# EAGLE board BatMeas5.1 (EAGLE 6.4)
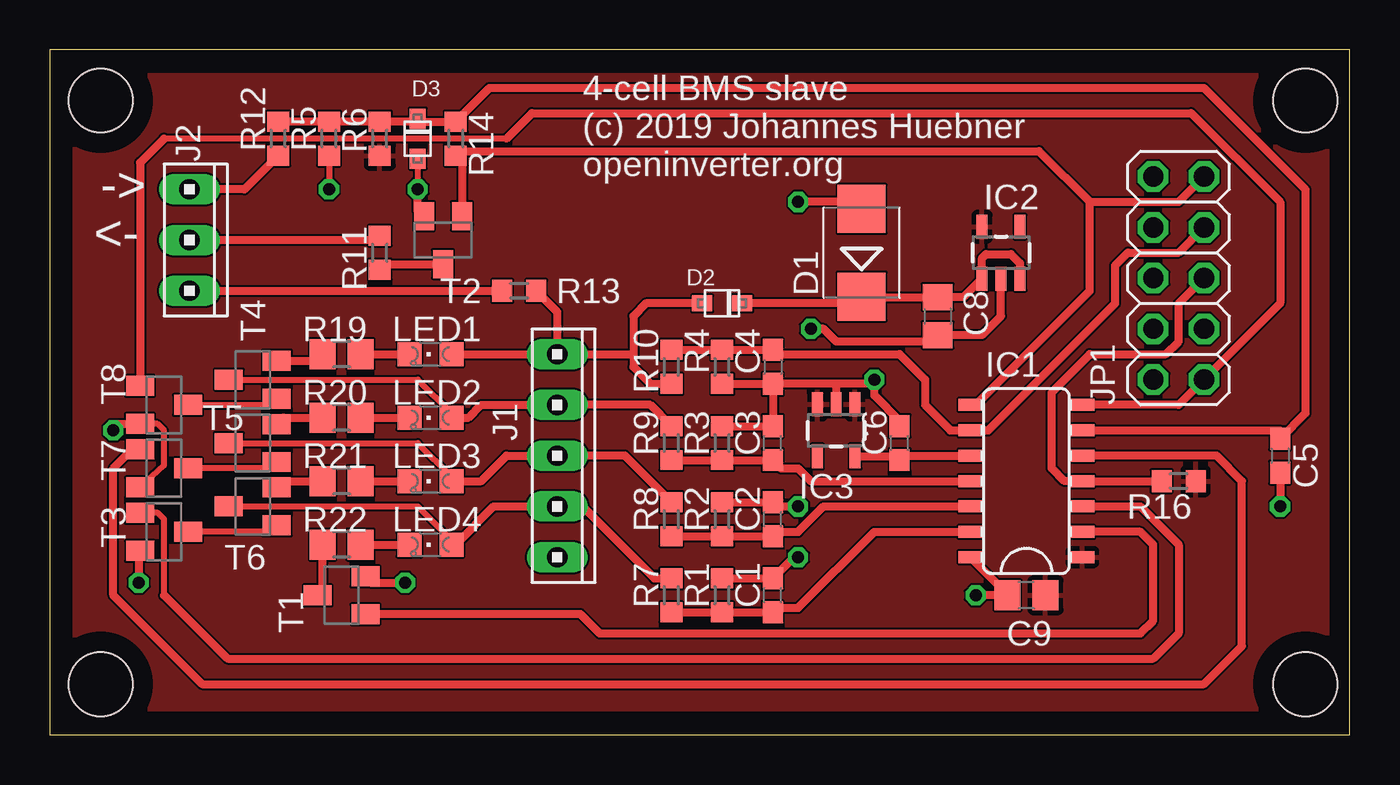
[diagram p0: board, top side]
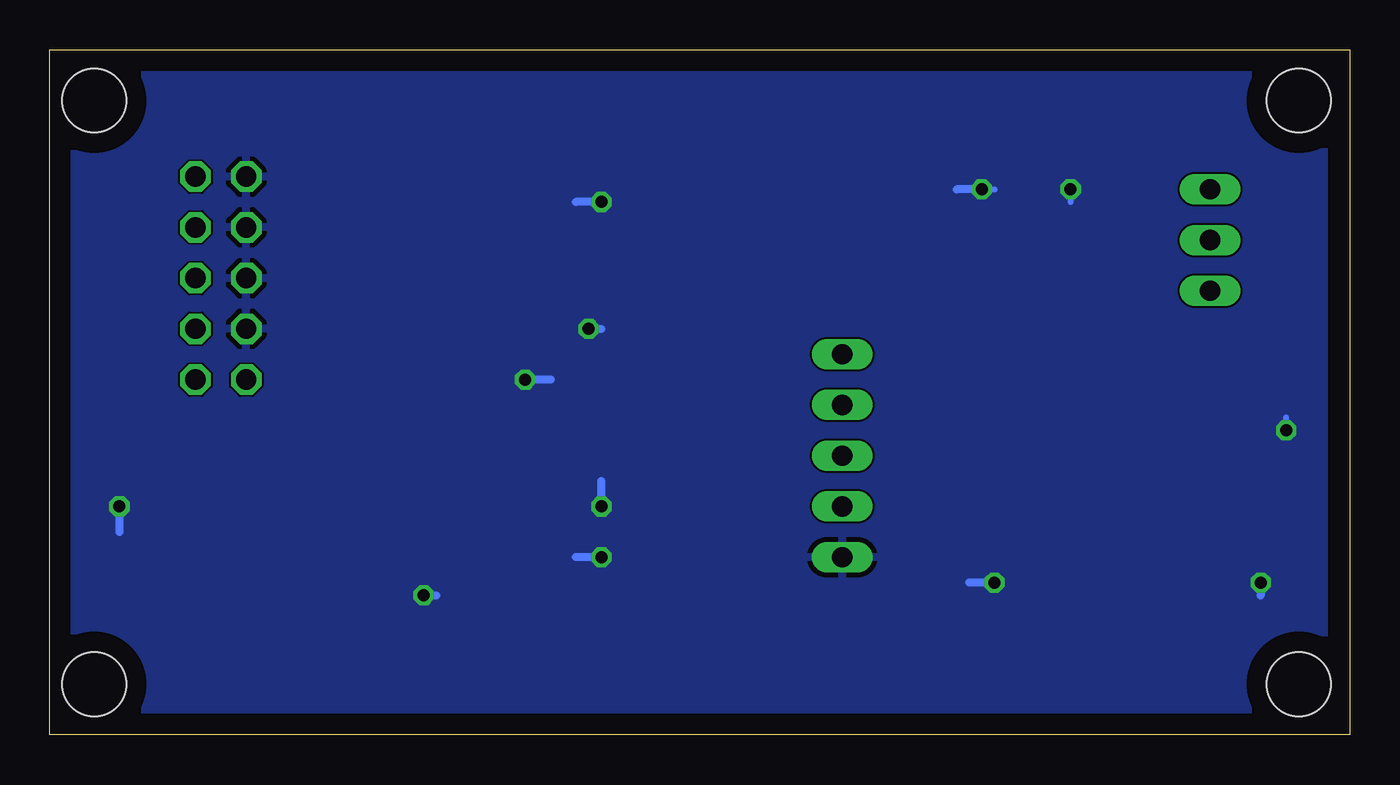
[diagram p1: board, bottom side, seen from below]

Size 65.08 x 34.28 mm. Coordinates in mm from the lower left corner, seen from the top.
Outline: 0,0 65.08,0 65.08,34.28 0,34.28 0,0
Copper layers (1*16): Top 0.035mm / dielectric 1.5mm / Bottom 0.035mm
Design rules "default *": minimum track width 10mil, minimum drill 0.3mm, track to track 4mil, track to pad 4mil, pad to pad 4mil, via to via 4mil, smd to smd 4mil, copper to edge 40mil, drill to drill 8mil, minimum pad ring 10mil, minimum via ring 8mil, stop-mask expansion 4mil, vias tented up to drill 0mil, thermal gap 10mil
Holes 3.2 mm at 2.54,31.75 2.54,2.54 62.87,2.54 62.87,31.75

## Footprints (pad centres in the part's own frame; a part is rotated, then mirrored left to right if it is on the bottom)
C0603 = smd 1.1 x 1: 1 -0.85,0; 2 0.85,0
C0805 = smd 1.3 x 1.5: 1 -0.95,0; 2 0.95,0
SMB = smd 2.4 x 2.4: A 2.2,0; C -2.2,0
SOD-323F = smd 1 x 0.8: A -1,0; C 1,0
SO014 = smd 0.6 x 1.2: 1 -3.175,-2.8; 2 -1.905,-2.8; 3 -0.635,-2.8; 4 0.635,-2.8; 5 1.905,-2.8; 6 3.175,-2.8; 7 4.445,-2.8; 8 4.445,2.8; 9 3.175,2.8; 10 1.905,2.8; 11 0.635,2.8; 12 -0.635,2.8; 13 -1.905,2.8; 14 -3.175,2.8
SOT23-5 = smd 0.55 x 1.2: 1 -0.95,-1.3; 2 0,-1.3; 3 0.95,-1.3; 4 0.95,1.3; 5 -0.95,1.3
10X05MTA = drill 1.016 long: 1 5.08,0; 2 2.54,0; 3 0,0; 4 -2.54,0; 5 -5.08,0
10X03MTA = drill 1.016 long: 1 2.54,0; 2 0,0; 3 -2.54,0
2X05 = drill 1.016 octagon: 1 -5.08,-1.27; 2 -5.08,1.27; 3 -2.54,-1.27; 4 -2.54,1.27; 5 0,-1.27; 6 0,1.27; 7 2.54,-1.27; 8 2.54,1.27; 9 5.08,-1.27; 10 5.08,1.27
CHIPLED_0805 = smd 1.2 x 1.2: A 0,-1.05; C 0,1.05
R0603 = smd 1 x 1.1: 1 -0.85,0; 2 0.85,0
R0805 = smd 1.3 x 1.5: 1 -0.95,0; 2 0.95,0
SC59-BEC = smd 1 x 1.4: B -0.95,-1.2; C 0,1.2; E 0.95,-1.2

## Placement (x,y rotation side)
C1  1µ  [C0603]  36.2,6.99 90 top
C2  100n  [C0603]  36.2,10.79 90 top
C3  100n  [C0603]  36.2,14.61 90 top
C4  100n  [C0603]  36.2,18.41 270 top
C5  4n7  [C0603]  61.59,13.97 270 top
C6  100n  [C0603]  42.55,14.61 90 top
C8  1µ  [C0805]  44.45,20.95 270 top
C9  10µ  [C0805]  48.9,6.99 180 top
D1  20V  [SMB]  40.64,24.13 90 top
D2  [SOD-323F]  33.66,21.59 0 top
D3  [SOD-323F]  18.41,29.84 90 top
IC1  ATTINY24  [SO014]  48.9,12.06 90 top
IC2  3V3  [SOT23-5]  47.62,24.13 0 top
IC3  3V  [SOT23-5]  39.37,15.24 180 top
J1  [10X05MTA]  25.4,13.97 270 top
J2  [10X03MTA]  6.99,24.77 270 top
JP1  [2X05]  56.52,22.86 90 top
LED1  150060GS75000  [CHIPLED_0805]  19.05,19.05 90 top
LED2  150060GS75000  [CHIPLED_0805]  19.05,15.88 90 top
LED3  150060GS75000  [CHIPLED_0805]  19.05,12.7 90 top
LED4  150060GS75000  [CHIPLED_0805]  19.05,9.53 90 top
R1  1M  [R0603]  33.66,6.99 90 top
R2  1M  [R0603]  33.66,10.79 90 top
R3  1M  [R0603]  33.66,14.61 90 top
R4  1M  [R0603]  33.66,18.41 270 top
R5  1k  [R0603]  13.97,29.84 90 top
R6  1k  [R0603]  16.51,29.84 270 top
R7  270k  [R0603]  31.11,6.99 90 top
R8  1540k  [R0603]  31.11,10.79 90 top
R9  2M8  [R0603]  31.11,14.61 90 top
R10  4M12  [R0603]  31.11,18.41 270 top
R11  270  [R0603]  16.51,24.13 90 top
R12  270  [R0603]  11.43,29.84 270 top
R13  1k  [R0603]  23.5,22.23 180 top
R14  100k  [R0603]  20.32,29.84 90 top
R16  4k7  [R0603]  56.52,12.7 180 top
R19  22  [R0805]  14.61,19.05 180 top
R20  22  [R0805]  14.61,15.88 180 top
R21  22  [R0805]  14.61,12.7 180 top
R22  22  [R0805]  14.61,9.53 180 top
T1  MMUN2233  [SC59-BEC]  14.61,6.99 90 top
T2  MMUN2233  [SC59-BEC]  19.68,24.77 180 top
T3  MMUN2233  [SC59-BEC]  5.71,10.16 270 top
T4  MMUN2111LT1G  [SC59-BEC]  10.16,17.78 90 top
T5  MMUN2111LT1G  [SC59-BEC]  10.16,14.61 90 top
T6  MMUN2111LT1G  [SC59-BEC]  10.16,11.43 90 top
T7  MMUN2233  [SC59-BEC]  5.71,13.34 270 top
T8  MMUN2233  [SC59-BEC]  5.71,16.51 270 top

## Library data of the parts
C1-C6 C8 C9 R1-R14 R16 R19-R22 = rcl
D1 = diode
D2 D3 = adafruit
IC1 = sparkfun
IC2 IC3 = SparkFun-PowerIC
J1 J2 = con-amp
JP1 = pinhead
LED1-LED4 = led
T1-T8 = transistor

## Nets
/RESET: IC1.4 JP1.5 R16.2
GND: C1.2 C2.2 C3.2 C4.2 C5.2 C6.2 C8.2 C9.2 D1.A D3.A IC1.14 IC2.2 IC3.2 J1.1 JP1.4 JP1.6 JP1.8 JP1.10 R1.2 R2.2 R3.2 R4.2 R5.1 T1.E T2.E T3.E T7.E T8.E
ICP: C5.1 D3.C IC1.6 R5.2 R6.1 R12.1 R14.2
MISO/INHIBIT: IC1.8 JP1.9 R14.1 T2.B
MOSI: IC1.7 JP1.1 T8.B
N$1: T3.C T6.B
N$2: C6.1 IC1.10 IC3.5
N$3: IC1.2 T1.B
N$4: IC1.3 T3.B
N$5: R19.2 T4.E
N$6: LED1.C R19.1
N$10: IC1.5 T7.B
N$11: R20.2 T5.E
N$12: J2.1 R13.2
N$13: LED2.C R20.1
N$14: R11.1 T2.C
N$17: D2.A J1.5 LED1.A R10.2 R13.1
N$18: LED3.C R21.1
N$19: LED4.C R22.1
N$20: R21.2 T6.E
N$21: R22.2 T1.C
N$22: J2.3 R12.2
N$23: J1.4 LED2.A R9.2 T4.C
N$24: J1.3 LED3.A R8.2 T5.C
N$25: J1.2 LED4.A R7.2 T6.C
N$30: T5.B T7.C
N$31: T4.B T8.C
TX: J2.2 R11.2
VBAT: C8.1 D1.C D2.C IC2.1 IC2.3
VBAT1: C1.1 IC1.13 R1.1 R7.1
VBAT2: C2.1 IC1.12 R2.1 R8.1
VBAT3: C3.1 IC1.11 R3.1 R9.1
VBAT4/SCK: C4.1 IC1.9 JP1.7 R4.1 R10.1
VCC: C9.1 IC1.1 IC2.5 IC3.1 IC3.3 R6.2 R16.1

## Tracks (layer width: path | path; a pad name or v marks a point on that pad's centre or on a via)
/RESET
  Top 0.406: JP1.5 56.52,21.59 56.52,19.68 55.88,19.05 52.07,19.05 50.16,17.14 50.16,13.34 50.8,12.7 IC1.4 R16.2
GND  (via drill 0.6)
  Top 0.305: D3.A v18.41,27.3 | T7.E 5.71,13.48 5.71,15.24 5.39,15.56 T8.E 4.29,15.24 | R5.1 v13.97,27.3
  Top 0.406: T1.E 16.02,7.62 v17.78,7.62 | R1.2 C1.2 37.25,8.89 v37.47,8.89 | R2.2 C2.2 36.41,11.43 v37.47,11.43 | R3.2 C3.2 C4.2 | R4.2 C4.2 | 39.37,17.57 41.06,17.57 v41.27,17.78 41.27,17 42.55,15.72 C6.2 | 39.37,17.57 C4.2 | T2.E 18.41,26.18 v18.41,27.3 | D1.A 40.3,26.67 v37.47,26.67 | T3.E 4.45,9.04 v4.45,7.62 | v38.1,20.32 38.73,20.32 39.37,19.68 44.13,19.68 C8.2 46.67,20 47.62,20.95 IC2.2 | v46.35,6.99 C9.2 47.95,7.04 IC1.14 | v3.17,15.24 3.5,15.56 T8.E | C5.2 v61.59,11.43 | IC3.2 39.37,17.57
  Bottom 0.305: v18.41,27.3 17.78,27.3 | v3.17,15.24 3.17,15.88 | v13.97,27.3 13.97,26.67
  Bottom 0.406: v17.78,7.62 19.05,7.62 | v37.47,8.89 38.73,8.89 | v37.47,11.43 37.47,12.7 | 40.01,17.78 v41.27,17.78 | v18.41,27.3 19.68,27.3 | v37.47,26.67 38.73,26.67 | v4.45,7.62 4.45,6.99 | v38.1,20.32 37.47,20.32 | v46.35,6.99 45.72,6.99 | v61.59,11.43 61.59,10.16
  pour Bottom: 1.27,33.02 64.14,33.02 64.14,1.27 1.27,1.27
ICP
  Top 0.406: IC1.6 61.59,15.24 C5.1 62.87,16.09 62.87,27.3 57.78,32.38 22.01,32.38 R14.2 18.57,30.7 D3.C 18.27,30.7 R6.1 R5.2 R12.1
MISO/INHIBIT
  Top 0.406: 20.95,25.55 T2.B 20.64,28.68 R14.1 20.54,29.21 49.53,29.21 52.07,26.67 | 52.07,26.67 52.07,22.23 46.35,16.51 IC1.8 | 52.07,26.67 56.52,26.67 JP1.9
MOSI
  Top 0.305: 22.86,29.84 5.71,29.84
  Top 0.406: IC1.7 56.52,16.51 JP1.1 61.59,21.59 61.59,26.67 57.15,31.11 24.13,31.11 22.86,29.84 | 5.71,29.84 4.51,28.64 T8.B
N$1
  Top 0.305: T6.B 11.04,10.16 T3.C
N$2
  Top 0.406: C6.1 42.36,13.94 | C6.1 42.76,13.97 IC1.10 | IC3.5 42.36,13.94 | 42.36,13.94 C6.1
N$3
  Top 0.406: IC1.2 54.61,10.16 55.24,9.53 55.24,5.71 54.61,5.08 27.52,5.08 26.57,6.04 T1.B 16.02,6.35
N$4
  Top 0.305: 5.71,6.99 5.71,10.79 5.4,11.11 T3.B
  Top 0.406: IC1.3 54.61,11.43 56.52,9.53 56.52,5.08 55.24,3.81 8.89,3.81 5.71,6.99
N$5
  Top 0.305: 13.34,18.73 R19.2
  Top 0.406: T4.E 13.34,18.73
N$6
  Top 0.406: R19.1 LED1.C
N$10
  Top 0.406: IC1.5 58.42,13.97 59.69,12.7 59.69,4.45 57.78,2.54 7.62,2.54 3.17,6.99 3.17,13.34 4.12,14.29 T7.B
N$11
  Top 0.305: T5.E 11.68,15.88
  Top 0.406: 11.68,15.88 R20.2
N$12
  Top 0.406: J2.1 R13.2
N$13
  Top 0.406: R20.1 LED2.C
N$14
  Top 0.406: R11.1 16.8,23.57 T2.C
N$17
  Top 0.406: R10.2 30.27,17.57 30.16,17.46 29.21,18.41 29.21,19.05 | D2.A 29.84,21.59 29.21,20.95 29.21,19.05 | LED1.A J1.5 | J1.5 29.21,19.05 | R13.1 25.4,21.17 J1.5
N$18
  Top 0.406: R21.1 LED3.C
N$19
  Top 0.406: R22.1 LED4.C
N$20
  Top 0.305: T6.E 11.68,12.7
  Top 0.406: 11.68,12.7 R21.2
N$21
  Top 0.305: T1.C 13.65,7.13
  Top 0.406: 13.65,7.13 R22.2
N$22
  Top 0.406: R12.2 9.74,27.3 J2.3
N$23
  Top 0.305: T4.C 18.41,17.78 20.1,16.09 LED2.A
  Top 0.406: LED2.A 20.95,15.88 21.59,16.51 J1.4 30.06,16.51 R9.2
N$24
  Top 0.305: T5.C 18.41,14.61 20.1,12.92 LED3.A
  Top 0.406: 20.1,12.92 20.32,12.7 21.59,12.7 22.86,13.97 J1.3 28.79,13.97 R8.2
N$25
  Top 0.305: T6.C 18.41,11.43 20.1,9.74 LED4.A 20.32,9.53
  Top 0.406: R7.2 30.27,7.83 26.67,11.43 J1.2 22.23,11.43 20.32,9.53
N$30
  Top 0.305: T5.B 11.04,13.34 T7.C
N$31
  Top 0.305: 6.88,16.58 7.59,16.51 10.79,16.51 11.12,16.83 T4.B
  Top 0.406: T8.C 6.88,16.58
TX
  Top 0.406: R11.2 16.3,24.77 J2.2
VBAT
  Top 0.406: D2.C 40.3,21.59 D1.C 41.01,21.56 41.35,21.91 C8.1 45.75,21.91 IC2.1 46.67,23.86 46.88,24.06 48.12,24.06 48.58,23.61 IC2.3
VBAT1
  Top 0.406: R7.1 R1.1 C1.1 36.41,6.35 37.47,6.35 41.27,10.16 IC1.13
VBAT2
  Top 0.406: R8.1 R2.1 C2.1 36.41,10.16 37.47,10.16 38.73,11.43 IC1.12
VBAT3
  Top 0.406: R9.1 R3.1 C3.1 36.62,13.34 37.47,13.34 38.1,12.7 IC1.11
VBAT4/SCK
  Top 0.406: R10.1 R4.1 C4.1 36.41,19.05 42.55,19.05 43.81,17.78 43.81,16.51 45.09,15.24 IC1.9 46.99,15.24 53.34,21.59 53.34,23.5 53.98,24.13 56.52,24.13 JP1.7
VCC
  pour Top: 1.27,33.02 64.14,33.02 64.14,1.27 1.27,1.27

## Text on the board
tNames: 4-cell BMS slave / (c) 2019 Johannes Huebner / openinverter.org | -> | <-